# EAGLE board phonebox (EAGLE 9.6.2)
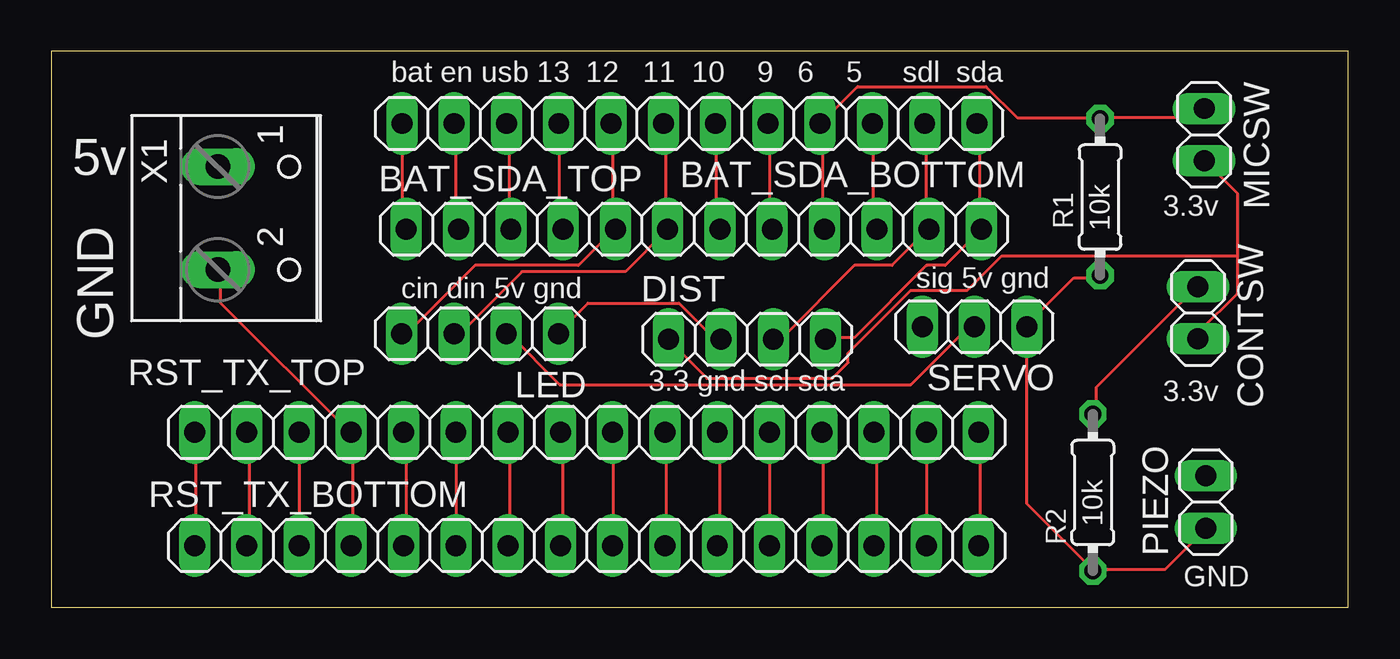
[diagram p0: board, top side]
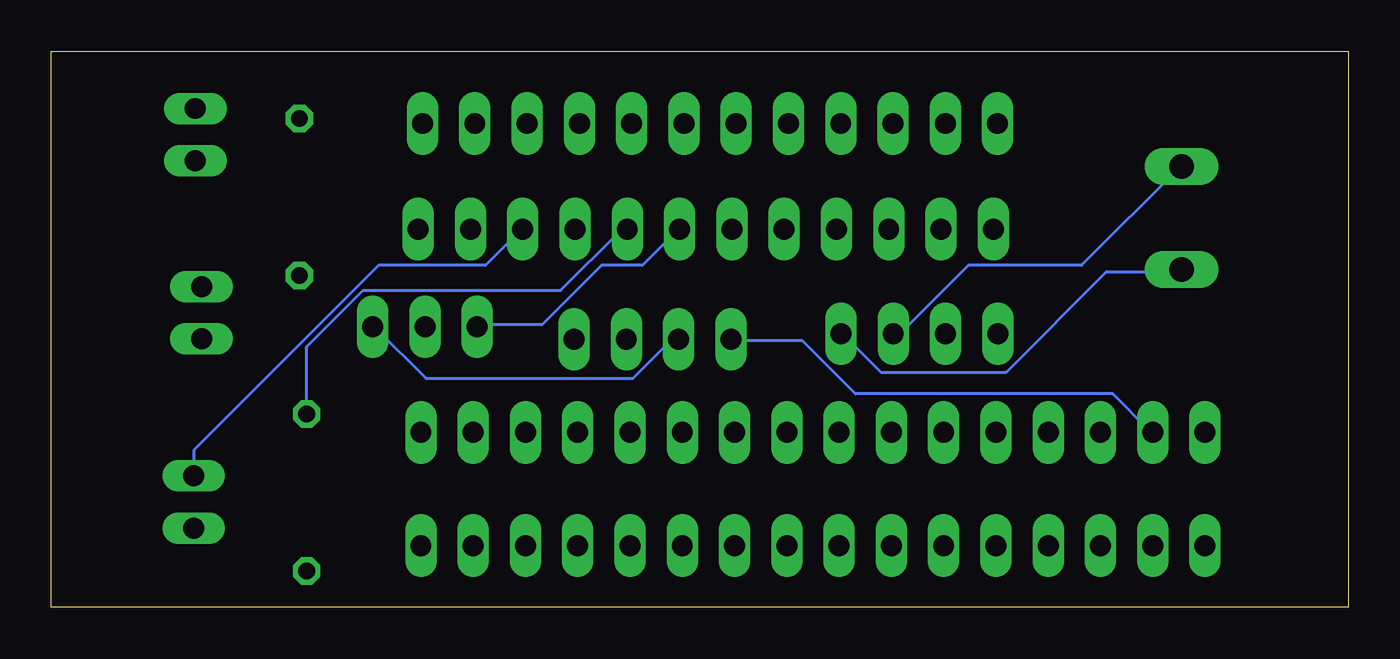
[diagram p1: board, bottom side, seen from below]

Size 63 x 27 mm. Coordinates in mm from the lower left corner, seen from the top.
Outline: 0,0 63,0 63,27 0,27 0,0
Copper layers (1*16): Top 0.035mm / dielectric 1.5mm / Bottom 0.035mm
Design rules "default": minimum track width 6mil, minimum drill 0.35mm, track to track 6mil, track to pad 6mil, pad to pad 6mil, via to via 6mil, smd to smd 6mil, copper to edge 40mil, drill to drill 6mil, minimum pad ring 10mil, minimum via ring 8mil, stop-mask expansion 4mil, vias tented up to drill 0mil, thermal gap 10mil

## Footprints (pad centres in the part's own frame; a part is rotated, then mirrored left to right if it is on the bottom)
1X12 = drill 1.016 long: 1 -13.97,0; 2 -11.43,0; 3 -8.89,0; 4 -6.35,0; 5 -3.81,0; 6 -1.27,0; 7 1.27,0; 8 3.81,0; 9 6.35,0; 10 8.89,0; 11 11.43,0; 12 13.97,0
1X02 = drill 1.016 long: 1 -1.27,0; 2 1.27,0
1X04 = drill 1.016 long: 1 -3.81,0; 2 -1.27,0; 3 1.27,0; 4 3.81,0
0204/7 = drill 0.813 octagon: 1 -3.81,0; 2 3.81,0
1X16 = drill 1.016 long: 1 -19.05,0; 2 -16.51,0; 3 -13.97,0; 4 -11.43,0; 5 -8.89,0; 6 -6.35,0; 7 -3.81,0; 8 -1.27,0; 9 1.27,0; 10 3.81,0; 11 6.35,0; 12 8.89,0; 13 11.43,0; 14 13.97,0; 15 16.51,0; 16 19.05,0
1X03 = drill 1.016 long: 1 -2.54,0; 2 0,0; 3 2.54,0
W237-102 = drill 1.194 long: 1 -2.5,-1.27; 2 2.5,-1.27

## Placement (x,y rotation side)
BAT_SDA_BOTTOM  [1X12]  31,23.5 180 top
BAT_SDA_TOP  [1X12]  31.21,18.37 0 top
CONTSW  [1X02]  55.71,14.31 90 top
DIST  [1X04]  33.8,13.02 0 top
LED  [1X04]  20.83,13.29 180 top
MICSW  [1X02]  56.01,22.96 90 top
PIEZO  [1X02]  56.09,5.12 90 top
R1  10k  [0204/7]  50.95,19.93 90 top
R2  10k  [0204/7]  50.6,5.58 90 top
RST_TX_BOTTOM  [1X16]  26,3 0 top
RST_TX_TOP  [1X16]  26,8.5 0 top
SERVO  [1X03]  44.85,13.63 180 top
X1  [W237-102]  9.35,18.91 270 top

## Library data of the parts
BAT_SDA_BOTTOM BAT_SDA_TOP CONTSW DIST LED MICSW PIEZO RST_TX_BOTTOM RST_TX_TOP SERVO = pinhead
R1 R2 = rcl; SPICEPREFIX: R
X1 = con-wago-500; MPN: 237-102; OC_FARNELL: unknown; OC_NEWARK: 70K9898

## Nets
3.3V: CONTSW.1 DIST.1 MICSW.1 RST_TX_BOTTOM.2 RST_TX_TOP.2
5V: LED.2 SERVO.2 X1.1
CONTSW: BAT_SDA_BOTTOM.5 BAT_SDA_TOP.8 CONTSW.2 R2.2
GND: DIST.2 LED.1 PIEZO.1 R1.1 R2.1 RST_TX_BOTTOM.4 RST_TX_TOP.4 SERVO.1 X1.2
LED_CIN: BAT_SDA_BOTTOM.8 BAT_SDA_TOP.5 LED.4
LED_DIN: BAT_SDA_BOTTOM.7 BAT_SDA_TOP.6 LED.3
MICSW: BAT_SDA_BOTTOM.4 BAT_SDA_TOP.9 MICSW.2 R1.2
N$1: RST_TX_BOTTOM.1 RST_TX_TOP.1
N$3: RST_TX_BOTTOM.3 RST_TX_TOP.3
N$5: RST_TX_BOTTOM.5 RST_TX_TOP.5
N$6: RST_TX_BOTTOM.6 RST_TX_TOP.6
N$7: RST_TX_BOTTOM.7 RST_TX_TOP.7
N$8: RST_TX_BOTTOM.8 RST_TX_TOP.8
N$9: RST_TX_BOTTOM.9 RST_TX_TOP.9
N$10: RST_TX_BOTTOM.10 RST_TX_TOP.10
N$11: RST_TX_BOTTOM.11 RST_TX_TOP.11
N$12: RST_TX_BOTTOM.12 RST_TX_TOP.12
N$13: RST_TX_BOTTOM.13 RST_TX_TOP.13
N$14: RST_TX_BOTTOM.14 RST_TX_TOP.14
N$15: RST_TX_BOTTOM.15 RST_TX_TOP.15
N$16: RST_TX_BOTTOM.16 RST_TX_TOP.16
N$17: BAT_SDA_BOTTOM.12 BAT_SDA_TOP.1
N$18: BAT_SDA_BOTTOM.11 BAT_SDA_TOP.2
N$19: BAT_SDA_BOTTOM.10 BAT_SDA_TOP.3
N$20: BAT_SDA_BOTTOM.9 BAT_SDA_TOP.4
PIEZZO: BAT_SDA_BOTTOM.3 BAT_SDA_TOP.10 PIEZO.2
SCL: BAT_SDA_BOTTOM.2 BAT_SDA_TOP.11 DIST.3
SDA: BAT_SDA_BOTTOM.1 BAT_SDA_TOP.12 DIST.4
SERVO: BAT_SDA_BOTTOM.6 BAT_SDA_TOP.7 SERVO.3

## Tracks (layer width: path | path; a pad name or v marks a point on that pad's centre or on a via)
3.3V
  Top 0.152: 57.61,17.07 57.61,20.12 56.08,21.64 MICSW.1 | 57.61,17.07 57.61,15.24 55.78,13.41 55.78,13.11 CONTSW.1 | RST_TX_BOTTOM.2 9.6,3.05 9.6,8.38 RST_TX_TOP.2 | 57.61,17.07 46.18,17.07 44.5,15.39 41.76,15.39 38.71,12.34 38.71,11.89 37.95,11.12 31.85,11.12 30.02,12.95 DIST.1
  Bottom 0.152: DIST.1 29.87,12.95 26.52,12.95 23.93,10.36 11.43,10.36 9.6,8.53 RST_TX_TOP.2
5V
  Top 0.152: SERVO.2 44.81,13.56 44.5,13.56 41.76,10.82 24.69,10.82 22.25,13.26 LED.2
  Bottom 0.152: LED.2 22.1,13.41 21.64,13.41 18.44,16.61 12.95,16.61 8.23,21.34 X1.1
CONTSW
  Top 0.152: BAT_SDA_TOP.8 34.9,18.44 34.9,23.47 BAT_SDA_BOTTOM.5 | R2.2 50.75,9.45 50.75,10.67 55.63,15.54 CONTSW.2
  Bottom 0.152: BAT_SDA_TOP.8 35.05,18.29 35.36,18.29 38.25,15.39 47.85,15.39 50.6,12.65 50.6,9.45 R2.2
GND
  Top 0.152: RST_TX_BOTTOM.4 14.63,3.05 14.63,8.38 RST_TX_TOP.4 14.48,8.53 8.23,14.78 8.23,16.31 X1.2 | DIST.2 32.46,13.11 32.16,13.11 30.48,14.78 26.06,14.78 24.69,13.41 LED.1 | R1.1 50.9,16 49.68,16 47.4,13.72 SERVO.1 47.4,13.56 47.4,5.03 50.6,1.83 R2.1 50.75,1.83 54.1,1.83 56.08,3.81 PIEZO.1
  Bottom 0.152: DIST.2 32.61,12.95 32.92,12.95 34.75,11.12 44.81,11.12 47.24,13.56 SERVO.1 | X1.2 8.23,16.31 11.73,16.31 16.61,11.43 22.71,11.43 24.54,13.26 LED.1
LED_CIN
  Top 0.152: LED.4 17.07,13.41 17.37,13.41 20.57,16.61 25.6,16.61 27.28,18.29 BAT_SDA_TOP.5 27.28,18.44 27.28,23.47 BAT_SDA_BOTTOM.8
LED_DIN
  Top 0.152: LED.3 19.66,13.41 19.96,13.41 22.86,16.31 27.89,16.31 29.87,18.29 BAT_SDA_TOP.6 29.87,18.44 29.87,23.47 BAT_SDA_BOTTOM.7
MICSW
  Top 0.152: MICSW.2 55.93,24.08 55.63,23.77 51.05,23.77 R1.2 50.9,23.77 46.94,23.77 45.41,25.3 39.17,25.3 37.49,23.62 BAT_SDA_BOTTOM.4 37.49,23.47 37.49,18.44 BAT_SDA_TOP.9
N$1
  Top 0.152: RST_TX_BOTTOM.1 7.01,3.05 7.01,8.38 RST_TX_TOP.1
N$3
  Top 0.152: RST_TX_BOTTOM.3 12.04,3.05 12.04,8.38 RST_TX_TOP.3
N$5
  Top 0.152: RST_TX_BOTTOM.5 17.22,3.05 17.22,8.38 RST_TX_TOP.5
N$6
  Top 0.152: RST_TX_BOTTOM.6 19.66,3.05 19.66,8.38 RST_TX_TOP.6
N$7
  Top 0.152: RST_TX_BOTTOM.7 22.25,3.05 22.25,8.38 RST_TX_TOP.7
N$8
  Top 0.152: RST_TX_BOTTOM.8 24.84,3.05 24.84,8.38 RST_TX_TOP.8
N$9
  Top 0.152: RST_TX_BOTTOM.9 27.28,3.05 27.28,8.38 RST_TX_TOP.9
N$10
  Top 0.152: RST_TX_BOTTOM.10 29.87,3.05 29.87,8.38 RST_TX_TOP.10
N$11
  Top 0.152: RST_TX_BOTTOM.11 32.46,3.05 32.46,8.38 RST_TX_TOP.11
N$12
  Top 0.152: RST_TX_BOTTOM.12 34.9,3.05 34.9,8.38 RST_TX_TOP.12
N$13
  Top 0.152: RST_TX_BOTTOM.13 37.49,3.05 37.49,8.38 RST_TX_TOP.13
N$14
  Top 0.152: RST_TX_BOTTOM.14 40.08,3.05 40.08,8.38 RST_TX_TOP.14
N$15
  Top 0.152: RST_TX_BOTTOM.15 42.52,3.05 42.52,8.38 RST_TX_TOP.15
N$16
  Top 0.152: RST_TX_BOTTOM.16 45.11,3.05 45.11,8.38 RST_TX_TOP.16
N$17
  Top 0.152: BAT_SDA_BOTTOM.12 17.07,23.47 17.07,18.59 17.22,18.44 BAT_SDA_TOP.1
N$18
  Top 0.152: BAT_SDA_BOTTOM.11 19.66,23.47 19.66,18.44 BAT_SDA_TOP.2
N$19
  Top 0.152: BAT_SDA_BOTTOM.10 22.25,23.47 22.25,18.44 BAT_SDA_TOP.3
N$20
  Top 0.152: BAT_SDA_BOTTOM.9 24.69,23.47 24.69,18.59 24.84,18.44 BAT_SDA_TOP.4
PIEZZO
  Top 0.152: BAT_SDA_BOTTOM.3 39.93,23.47 39.93,18.59 40.08,18.44 BAT_SDA_TOP.10
  Bottom 0.152: PIEZO.2 56.08,7.62 47.09,16.61 41.91,16.61 40.23,18.29 BAT_SDA_TOP.10
SCL
  Top 0.152: DIST.3 35.2,13.11 35.51,13.11 39.01,16.61 40.84,16.61 42.52,18.29 BAT_SDA_TOP.11 42.52,18.44 42.52,23.47 BAT_SDA_BOTTOM.2
SDA
  Top 0.152: DIST.4 37.64,13.11 39.01,13.11 42.52,16.61 43.43,16.61 45.11,18.29 BAT_SDA_TOP.12 45.11,18.44 45.11,23.47 BAT_SDA_BOTTOM.1
SERVO
  Top 0.152: BAT_SDA_BOTTOM.6 32.31,23.47 32.31,18.59 32.46,18.44 BAT_SDA_TOP.7
  Bottom 0.152: SERVO.3 42.22,13.72 39.17,13.72 36.27,16.61 34.29,16.61 32.61,18.29 BAT_SDA_TOP.7

## Text on the board
tPlace: bat en usb 13 12 11 10 9 6 5 sdl sda | 5v | 3.3v | sig 5v gnd | cin din 5v gnd | GND | 3.3 gnd scl sda | 3.3v | GND